# EAGLE board mm16 (EAGLE 6.1)
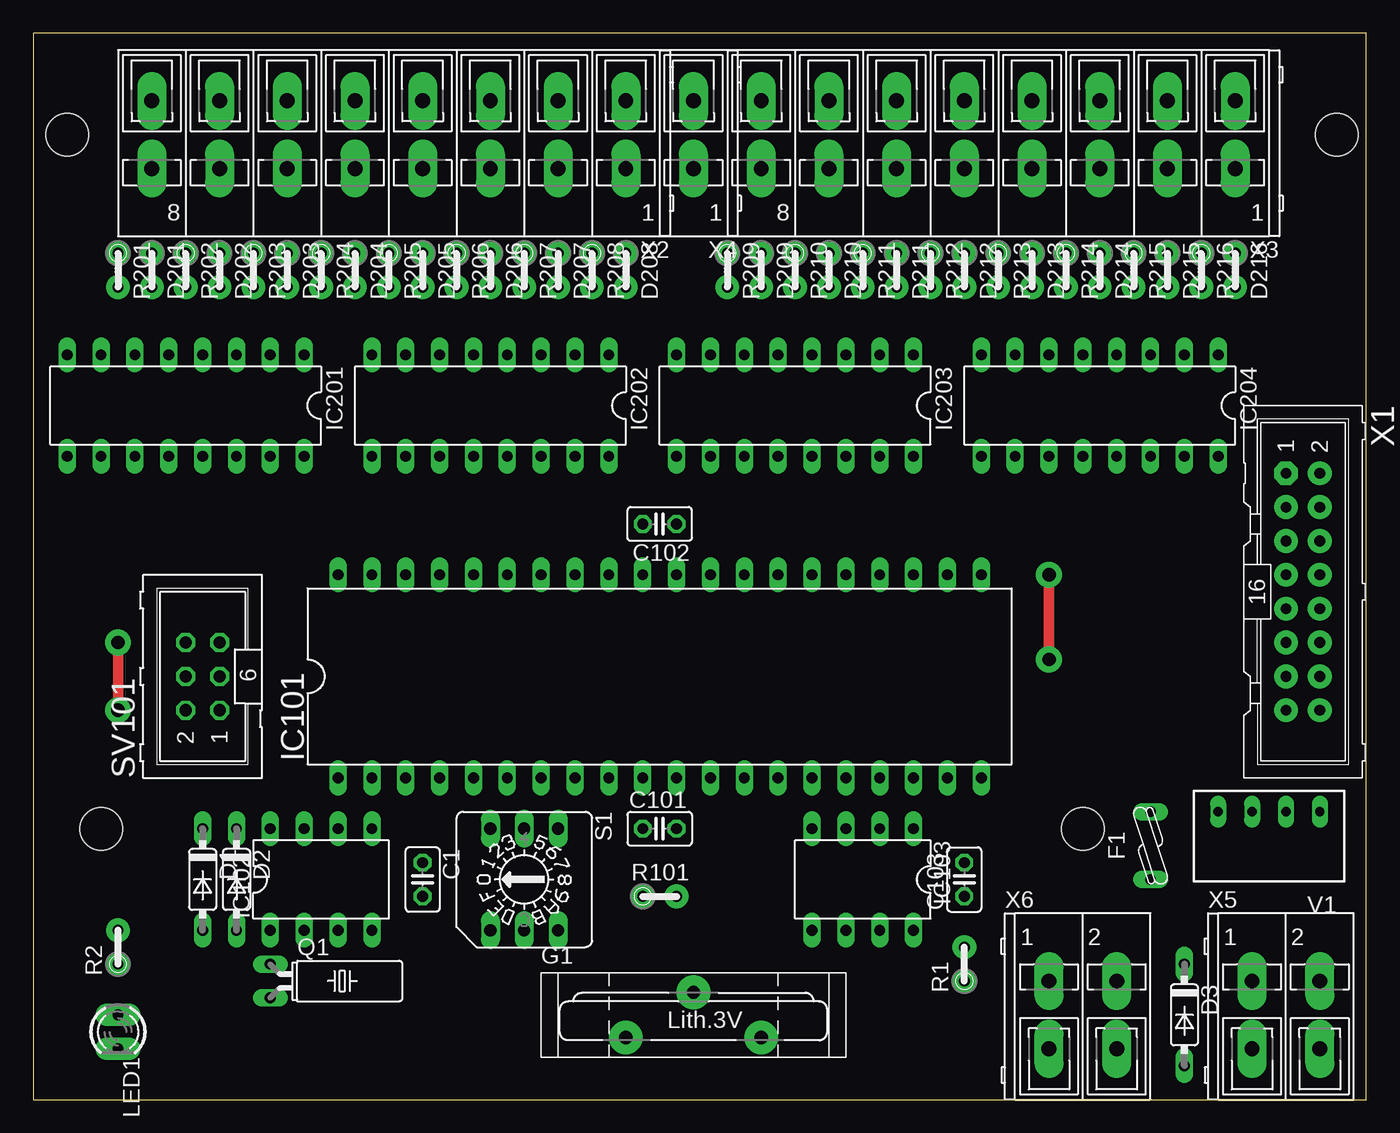
[diagram p0: board, top side]
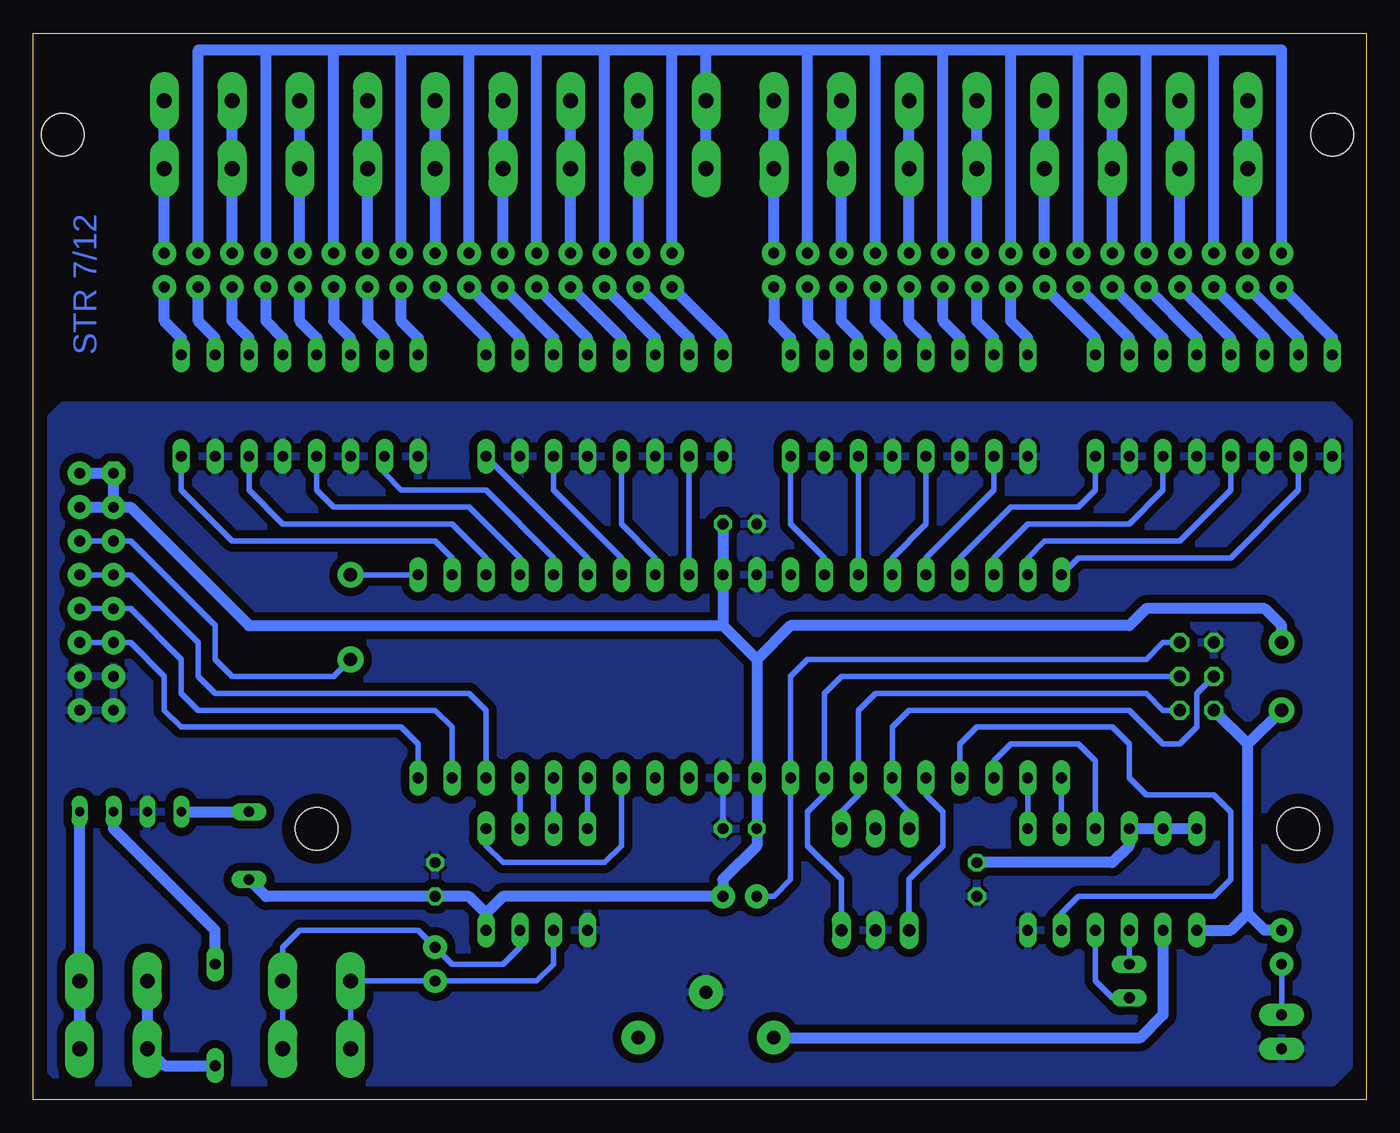
[diagram p1: board, bottom side, seen from below]

Size 100 x 80 mm. Coordinates in mm from the lower left corner, seen from the top.
Outline: 0,0 100,0 100,80 0,80 0,0
Copper layers (1*16): Top 0.035mm / dielectric 1.5mm / Bottom 0.035mm
Design rules: minimum track width 16mil, minimum drill 0.6mm, track to track 16mil, track to pad 16mil, pad to pad 16mil, via to via 16mil, smd to smd 16mil, copper to edge 1mm, drill to drill 1mm, minimum pad ring 10mil, minimum via ring 8mil, stop-mask expansion 4mil, vias tented up to drill 0mil, thermal gap 10mil
Holes 3.2 mm at 2.54,72.39 97.79,72.39 5.08,20.32 78.74,20.32

## Footprints (pad centres in the part's own frame; a part is rotated, then mirrored left to right if it is on the bottom)
C025-025X050 = drill 0.813 octagon: 1 -1.27,0; 2 1.27,0
DO35-7@1 = drill 0.813 long: A 3.81,0; C -3.81,0
DO35-7 = drill 0.813 long: A 3.81,0; C -3.81,0
DO35-V = drill 0.813 pad 1.778: 1 -1.27,0; 2 1.27,0
LP60-020 = drill 0.8 long: P$1 -2.54,0; P$2 2.54,0
KZH20PCB-V = drill 1 pad 2.54: +1 5.08,1.7; +2 -5.08,1.7; - 0,-1.7
DIL40 = drill 0.813 long: 1 -24.13,-7.62; 2 -21.59,-7.62; 3 -19.05,-7.62; 4 -16.51,-7.62; 5 -13.97,-7.62; 6 -11.43,-7.62; 7 -8.89,-7.62; 8 -6.35,-7.62; 9 -3.81,-7.62; 10 -1.27,-7.62; 11 1.27,-7.62; 12 3.81,-7.62; 13 6.35,-7.62; 14 8.89,-7.62; 15 11.43,-7.62; 16 13.97,-7.62; 17 16.51,-7.62; 18 19.05,-7.62; 19 21.59,-7.62; 20 24.13,-7.62; 21 24.13,7.62; 22 21.59,7.62; 23 19.05,7.62; 24 16.51,7.62; 25 13.97,7.62; 26 11.43,7.62; 27 8.89,7.62; 28 6.35,7.62; 29 3.81,7.62; 30 1.27,7.62; 31 -1.27,7.62; 32 -3.81,7.62; 33 -6.35,7.62; 34 -8.89,7.62; 35 -11.43,7.62; 36 -13.97,7.62; 37 -16.51,7.62; 38 -19.05,7.62; 39 -21.59,7.62; 40 -24.13,7.62
DIL08 = drill 0.813 long: 1 -3.81,-3.81; 2 -1.27,-3.81; 3 1.27,-3.81; 4 3.81,-3.81; 5 3.81,3.81; 6 1.27,3.81; 7 -1.27,3.81; 8 -3.81,3.81
DIL16 = drill 0.813 long: 1 -8.89,-3.81; 2 -6.35,-3.81; 3 -3.81,-3.81; 4 -1.27,-3.81; 5 1.27,-3.81; 6 3.81,-3.81; 7 6.35,-3.81; 8 8.89,-3.81; 9 8.89,3.81; 10 6.35,3.81; 11 3.81,3.81; 12 1.27,3.81; 13 -1.27,3.81; 14 -3.81,3.81; 15 -6.35,3.81; 16 -8.89,3.81
LED3MM = drill 0.813 pad 1.676 long: A -1.27,0; K 1.27,0
TC38H = drill 0.813 long: 1 -1.27,0; 2 1.27,0
0204V = drill 0.813 pad 1.778: 1 -1.27,0; 2 1.27,0
P103 = drill 0.914 long: 1 3.81,-2.54; 2 -3.81,2.54; 4 3.81,2.54; 8 -3.81,-2.54; C 3.81,0; C1 -3.81,0
ML6 = drill 0.914 octagon: GND 2.54,1.27; MISO -2.54,-1.27; MOSI 0,1.27; RESET 2.54,-1.27; SCK 0,-1.27; VCC -2.54,1.27
TME-24V = drill 0.7 pad 1.1 long: 1 -3.81,0; 2 -1.27,0; 3 1.27,0; 4 3.81,0
WS16V = drill 0.8 pad 1.778 octagon: 1 -8.89,-1.27 | drill 0.8 pad 1.778: 2 -8.89,1.27; 3 -6.35,-1.27; 4 -6.35,1.27; 5 -3.81,-1.27; 6 -3.81,1.27; 7 -1.27,-1.27; 8 -1.27,1.27; 9 1.27,-1.27; 10 1.27,1.27; 11 3.81,-1.27; 12 3.81,1.27; 13 6.35,-1.27; 14 6.35,1.27; 15 8.89,-1.27; 16 8.89,1.27
WAGO_236-408 = drill 1.118 pad 2.184 long: A1 -17.78,-3.81; A2 -12.7,-3.81; A3 -7.62,-3.81; A4 -2.54,-3.81; A5 2.54,-3.81; A6 7.62,-3.81; A7 12.7,-3.81; A8 17.78,-3.81; B1 -17.78,1.27; B2 -12.7,1.27; B3 -7.62,1.27; B4 -2.54,1.27; B5 2.54,1.27; B6 7.62,1.27; B7 12.7,1.27; B8 17.78,1.27
WAGO_236-401 = drill 1.118 pad 2.184 long: A1 0,-3.81; B1 0,1.27
WAGO_236-402 = drill 1.118 pad 2.184 long: A1 -2.54,-3.81; A2 2.54,-3.81; B1 -2.54,1.27; B2 2.54,1.27

## Placement (x,y rotation side)
C1  100nF  [C025-025X050]  29.21,16.51 270 top
C101  100nF  [C025-025X050]  46.99,20.32 0 top
C102  100nF  [C025-025X050]  46.99,43.18 180 top
C103  100nF  [C025-025X050]  69.85,16.51 90 top
D1  1N4148-7  [DO35-7@1]  12.7,16.51 270 top
D2  1N4148-7  [DO35-7@1]  15.24,16.51 270 top
D3  [DO35-7]  86.36,6.35 270 top
D201  1N4148-V  [DO35-V]  8.89,62.23 270 top
D202  1N4148-V  [DO35-V]  13.97,62.23 270 top
D203  1N4148-V  [DO35-V]  19.05,62.23 270 top
D204  1N4148-V  [DO35-V]  24.13,62.23 270 top
D205  1N4148-V  [DO35-V]  29.21,62.23 270 top
D206  1N4148-V  [DO35-V]  34.29,62.23 270 top
D207  1N4148-V  [DO35-V]  39.37,62.23 270 top
D208  1N4148-V  [DO35-V]  44.45,62.23 270 top
D209  1N4148-V  [DO35-V]  54.61,62.23 270 top
D210  1N4148-V  [DO35-V]  59.69,62.23 270 top
D211  1N4148-V  [DO35-V]  64.77,62.23 270 top
D212  1N4148-V  [DO35-V]  69.85,62.23 270 top
D213  1N4148-V  [DO35-V]  74.93,62.23 270 top
D214  1N4148-V  [DO35-V]  80.01,62.23 270 top
D215  1N4148-V  [DO35-V]  85.09,62.23 270 top
D216  1N4148-V  [DO35-V]  90.17,62.23 270 top
F1  LP60-020  [LP60-020]  83.82,19.05 90 top
G1  KZH20PCB-V  [KZH20PCB-V]  49.53,6.35 180 top
IC101  ATMEGA32-PU  [DIL40]  46.99,31.75 0 top
IC102  DS1337  [DIL08]  21.59,16.51 0 top
IC103  MAX483CPA  [DIL08]  62.23,16.51 180 top
IC201  LTV847  [DIL16]  11.43,52.07 180 top
IC202  LTV847  [DIL16]  34.29,52.07 180 top
IC203  LTV847  [DIL16]  57.15,52.07 180 top
IC204  LTV847  [DIL16]  80.01,52.07 180 top
LED1  [LED3MM]  6.35,5.08 270 top
Q1  32,768kHz  [TC38H]  17.78,8.89 270 top
R1  120Ω  [0204V]  69.85,10.16 90 top
R2  390Ω  [0204V]  6.35,11.43 90 top
R101  10k  [0204V]  46.99,15.24 0 top
R201  220kΩ  [0204V]  6.35,62.23 270 top
R202  220kΩ  [0204V]  11.43,62.23 270 top
R203  220kΩ  [0204V]  16.51,62.23 270 top
R204  220kΩ  [0204V]  21.59,62.23 270 top
R205  220kΩ  [0204V]  26.67,62.23 270 top
R206  220kΩ  [0204V]  31.75,62.23 270 top
R207  220kΩ  [0204V]  36.83,62.23 270 top
R208  220kΩ  [0204V]  41.91,62.23 270 top
R209  220kΩ  [0204V]  52.07,62.23 270 top
R210  220kΩ  [0204V]  57.15,62.23 270 top
R211  220kΩ  [0204V]  62.23,62.23 270 top
R212  220kΩ  [0204V]  67.31,62.23 270 top
R213  220kΩ  [0204V]  72.39,62.23 270 top
R214  220kΩ  [0204V]  77.47,62.23 270 top
R215  220kΩ  [0204V]  82.55,62.23 270 top
R216  220kΩ  [0204V]  87.63,62.23 270 top
S1  [P103]  36.83,16.51 270 top
SV101  [ML6]  12.7,31.75 90 top
V1  TME2405S  [TME-24V]  92.71,21.59 180 top
X1  [WS16V]  95.25,38.1 270 top
X2  [WAGO_236-408]  26.67,71.12 180 top
X3  [WAGO_236-408]  72.39,71.12 180 top
X4  [WAGO_236-401]  49.53,71.12 180 top
X5  [WAGO_236-402]  93.98,7.62 0 top
X6  [WAGO_236-402]  78.74,7.62 0 top

## Library data of the parts
C1 C101-C103 Q1 R1 R2 R101 R201-R216 = passiv
D1-D3 D201-D216 = diode
F1 = sicherung
G1 = batterie
IC101 = ic-mcu
IC102 = ic-controller
IC103 = ic-wandler
IC201-IC204 = ic-optokoppler
LED1 = led
S1 = switch-dil; OC_FARNELL: unknown; OC_NEWARK: unknown
SV101 = stecker
V1 = schaltregler; MPN: TME 2405S; OC_FARNELL: 1007547; OC_NEWARK: 51R5329
X1-X6 = anschluss

## Nets
!R: IC101.21 X1.5 X1.6
+5V: C101.1 C102.1 C103.1 D1.A F1.P$1 IC101.10 IC101.30 IC103.8 R2.2 R101.2 SV101.VCC X1.1 X1.2 X1.3 X1.4
ALARM1: IC101.4 IC102.3
ALARM2: IC101.3 IC102.7
C1: IC101.18 X1.7 X1.8
C2: IC101.19 X1.9 X1.10
D: IC101.20 X1.11 X1.12
GND: C1.2 C101.2 C102.2 C103.2 G1.- IC101.11 IC101.31 IC102.4 IC103.5 IC201.9 IC201.11 IC201.13 IC201.15 IC202.9 IC202.11 IC202.13 IC202.15 IC203.9 IC203.11 IC203.13 IC203.15 IC204.9 IC204.11 IC204.13 IC204.15 LED1.K S1.C SV101.GND V1.3 X1.13 X1.14 X1.15 X1.16
GNDIO: R201.1 R202.1 R203.1 R204.1 R205.1 R206.1 R207.1 R208.1 R209.1 R210.1 R211.1 R212.1 R213.1 R214.1 R215.1 R216.1 X4.A1 X4.B1
IN0: IC101.40 IC201.10
IN1: IC101.39 IC201.12
IN2: IC101.38 IC201.14
IN3: IC101.37 IC201.16
IN4: IC101.36 IC202.10
IN5: IC101.35 IC202.12
IN6: IC101.34 IC202.14
IN7: IC101.33 IC202.16
IN8: IC101.29 IC203.10
IN9: IC101.28 IC203.12
IN10: IC101.27 IC203.14
IN11: IC101.26 IC203.16
IN12: IC101.25 IC204.10
IN13: IC101.24 IC204.12
IN14: IC101.23 IC204.14
IN15: IC101.22 IC204.16
N$1: D201.2 IC201.7
N$2: IC201.8 R201.2
N$3: D202.2 IC201.5
N$4: IC201.6 R202.2
N$5: D203.2 IC201.3
N$6: IC201.4 R203.2
N$7: D204.2 IC201.1
N$8: IC201.2 R204.2
N$9: D205.2 IC202.7
N$10: IC202.8 R205.2
N$11: D206.2 IC202.5
N$12: IC202.6 R206.2
N$13: D207.2 IC202.3
N$14: IC202.4 R207.2
N$15: D208.2 IC202.1
N$16: IC202.2 R208.2
N$19: V1.1 X5.A2 X5.B2
N$20: IC103.6 R1.1 X6.A1 X6.B1
N$21: D2.A G1.+1 G1.+2
N$22: IC103.7 R1.2 X6.A2 X6.B2
N$23: D3.C V1.2
N$24: D3.A X5.A1 X5.B1
N$25: D209.2 IC203.7
N$26: IC203.8 R209.2
N$27: D210.2 IC203.5
N$28: IC203.6 R210.2
N$29: D211.2 IC203.3
N$30: IC203.4 R211.2
N$31: D212.2 IC203.1
N$32: IC203.2 R212.2
N$33: D213.2 IC204.7
N$34: IC204.8 R213.2
N$35: D214.2 IC204.5
N$36: IC204.6 R214.2
N$37: D215.2 IC204.3
N$38: IC204.4 R215.2
N$39: D216.2 IC204.1
N$40: IC204.2 R216.2
N$41: F1.P$2 V1.4
N$42: IC101.9 R101.1 SV101.RESET
N$44: LED1.A R2.1
N$50: D204.1 X2.A5 X2.B5
N$52: D203.1 X2.A6 X2.B6
N$55: D202.1 X2.A7 X2.B7
N$57: D201.1 X2.A8 X2.B8
N$61: IC101.15 IC103.4
N$62: IC101.14 IC103.1
N$63: IC101.17 IC103.2
N$64: IC101.16 IC103.3
N$65: D205.1 X2.A4 X2.B4
N$67: D206.1 X2.A3 X2.B3
N$69: D207.1 X2.A2 X2.B2
N$71: D208.1 X2.A1 X2.B1
N$73: D216.1 X3.A1 X3.B1
N$77: D215.1 X3.A2 X3.B2
N$79: D214.1 X3.A3 X3.B3
N$81: D213.1 X3.A4 X3.B4
N$83: D212.1 X3.A5 X3.B5
N$85: D211.1 X3.A6 X3.B6
N$86: D209.1 X3.A8 X3.B8
N$88: D210.1 X3.A7 X3.B7
N$122: IC101.6 S1.8 SV101.MOSI
N$123: IC101.7 S1.2 SV101.MISO
N$125: IC101.8 S1.4 SV101.SCK
N$126: IC102.1 Q1.1
N$127: IC102.2 Q1.2
N$130: IC101.5 S1.1
SCL: IC101.1 IC102.6
SDA: IC101.2 IC102.5
VCC: C1.1 D1.C D2.C IC102.8

## Tracks (layer width: path | path; a pad name or v marks a point on that pad's centre or on a via)
!R  (via drill 1 pad 1.93)
  Top 0.8: v76.2,33.02 v76.2,39.37
  Bottom 0.406: X1.6 X1.5 92.71,41.91 86.36,35.56 86.36,33.02 85.09,31.75 77.47,31.75 v76.2,33.02 | v76.2,39.37 IC101.21
+5V  (via drill 1 pad 1.93)
  Top 0.8: v6.35,29.21 v6.35,34.29
  Bottom 0.813: 66.04,13.97 64.77,15.24 R101.2 48.26,16.51 45.72,19.05 C101.1 IC101.10 45.72,33.02 | 66.04,13.97 IC103.8 | C102.1 IC101.30 48.26,35.56 | 48.26,35.56 45.72,33.02 | 66.04,13.97 67.31,15.24 C103.1 82.55,15.24 F1.P$1 | X1.4 X1.3 | X1.2 X1.1 X1.3 | X1.3 92.71,44.45 83.82,35.56 48.26,35.56 | v6.35,34.29 6.35,35.56 7.62,36.83 16.51,36.83 17.78,35.56 43.18,35.56 45.72,33.02 | D1.A 10.16,12.7 8.89,13.97 | 8.89,13.97 8.89,26.67 | SV101.VCC 8.89,26.67 | 8.89,26.67 v6.35,29.21 | R2.2 7.62,12.7 8.89,13.97
ALARM1
  Bottom 0.406: IC102.3 22.86,13.97 21.59,15.24 11.43,15.24 10.16,16.51 10.16,21.59 11.43,22.86 16.51,22.86 17.78,24.13 17.78,26.67 19.05,27.94 29.21,27.94 30.48,26.67 IC101.4
ALARM2
  Bottom 0.406: IC101.3 27.94,25.4 26.67,26.67 21.59,26.67 20.32,25.4 IC102.7
C1
  Bottom 0.406: X1.8 X1.7 92.71,39.37 87.63,34.29 87.63,31.75 86.36,30.48 67.31,30.48 66.04,29.21 IC101.18
C2
  Bottom 0.406: X1.10 X1.9 92.71,36.83 88.9,33.02 88.9,30.48 87.63,29.21 69.85,29.21 68.58,27.94 IC101.19
D
  Bottom 0.406: X1.12 X1.11 92.71,34.29 90.17,31.75 90.17,29.21 88.9,27.94 72.39,27.94 71.12,26.67 IC101.20
GND
  Bottom 0.406: IC101.11 C101.2
  pour Bottom (isolate 0.61): 2.54,52.07 97.79,52.07 99.06,50.8 99.06,2.54 97.79,1.27 2.54,1.27 1.27,2.54 1.27,50.8
GNDIO
  Bottom 0.813: R216.1 87.63,78.74 82.55,78.74 | R215.1 82.55,78.74 | R214.1 77.47,78.74 | R213.1 72.39,78.74 | R212.1 67.31,78.74 | R211.1 62.23,78.74 | R210.1 57.15,78.74 | R209.1 52.07,78.74 | R208.1 41.91,78.74 | R207.1 36.83,78.74 | R206.1 31.75,78.74 | R205.1 26.67,78.74 | R204.1 21.59,78.74 | R203.1 16.51,78.74 | R202.1 11.43,78.74 | R201.1 6.35,78.74 11.43,78.74 | 11.43,78.74 16.51,78.74 | 16.51,78.74 21.59,78.74 | 21.59,78.74 26.67,78.74 | 26.67,78.74 31.75,78.74 | 31.75,78.74 36.83,78.74 | 36.83,78.74 41.91,78.74 | 41.91,78.74 49.53,78.74 | 49.53,78.74 52.07,78.74 | 52.07,78.74 57.15,78.74 | 57.15,78.74 62.23,78.74 | 62.23,78.74 67.31,78.74 | 67.31,78.74 72.39,78.74 | 72.39,78.74 77.47,78.74 | 77.47,78.74 82.55,78.74 | X4.B1 X4.A1 49.53,78.74
IN0
  Bottom 0.406: IC201.10 5.08,45.72 10.16,40.64 21.59,40.64 IC101.40
IN1
  Bottom 0.406: IC201.12 10.16,45.72 13.97,41.91 24.13,41.91 25.4,40.64 IC101.39
IN2
  Bottom 0.406: IC201.14 15.24,45.72 17.78,43.18 25.4,43.18 27.94,40.64 IC101.38
IN3
  Bottom 0.406: IC201.16 20.32,45.72 21.59,44.45 26.67,44.45 30.48,40.64 IC101.37
IN4
  Bottom 0.406: IC202.10 27.94,45.72 33.02,40.64 IC101.36
IN5
  Bottom 0.406: IC202.12 33.02,43.18 35.56,40.64 IC101.35
IN6
  Bottom 0.406: IC202.14 IC101.34
IN7
  Bottom 0.406: IC202.16 43.18,43.18 40.64,40.64 IC101.33
IN8
  Bottom 0.406: IC203.10 IC101.29
IN9
  Bottom 0.406: IC203.12 55.88,43.18 53.34,40.64 IC101.28
IN10
  Bottom 0.406: IC203.14 60.96,45.72 55.88,40.64 IC101.27
IN11
  Bottom 0.406: IC203.16 58.42,40.64 IC101.26
IN12
  Bottom 0.406: IC204.10 73.66,46.99 72.39,45.72 66.04,45.72 60.96,40.64 IC101.25
IN13
  Bottom 0.406: IC101.24 63.5,40.64 67.31,44.45 77.47,44.45 78.74,45.72 IC204.12
IN14
  Bottom 0.406: IC101.23 66.04,40.64 68.58,43.18 81.28,43.18 83.82,45.72 IC204.14
IN15
  Bottom 0.406: IC101.22 68.58,40.64 69.85,41.91 85.09,41.91 88.9,45.72 IC204.16
N$1
  Bottom 0.813: D201.2 5.08,57.15 IC201.7
N$2
  Bottom 0.813: R201.2 2.54,57.15 IC201.8
N$3
  Bottom 0.813: D202.2 10.16,57.15 IC201.5
N$4
  Bottom 0.813: R202.2 7.62,57.15 IC201.6
N$5
  Bottom 0.813: D203.2 15.24,57.15 IC201.3
N$6
  Bottom 0.813: R203.2 12.7,57.15 IC201.4
N$7
  Bottom 0.813: D204.2 20.32,57.15 IC201.1
N$8
  Bottom 0.813: R204.2 17.78,57.15 IC201.2
N$9
  Bottom 0.813: IC202.7 27.94,57.15 29.21,58.42 D205.2
N$10
  Bottom 0.813: IC202.8 25.4,57.15 26.67,58.42 R205.2
N$11
  Bottom 0.813: IC202.5 33.02,57.15 34.29,58.42 D206.2
N$12
  Bottom 0.813: IC202.6 30.48,57.15 31.75,58.42 R206.2
N$13
  Bottom 0.813: IC202.3 38.1,57.15 39.37,58.42 D207.2
N$14
  Bottom 0.813: IC202.4 35.56,57.15 36.83,58.42 R207.2
N$15
  Bottom 0.813: D208.2 44.45,58.42 43.18,57.15 IC202.1
N$16
  Bottom 0.813: R208.2 41.91,58.42 40.64,57.15 IC202.2
N$19
  Bottom 0.813: X5.B2 X5.A2 V1.1
N$20
  Bottom 0.406: X6.A1 X6.B1 R1.1 62.23,8.89 60.96,10.16 IC103.6
N$21
  Bottom 0.813: D2.A 15.24,6.35 16.94,4.65 G1.+1
N$22
  Bottom 0.406: IC103.7 63.5,11.43 64.77,10.16 68.58,10.16 R1.2 71.12,12.7 80.01,12.7 81.28,11.43 X6.B2 X6.A2
N$23
  Bottom 0.813: D3.C 86.36,12.7 93.98,20.32 V1.2
N$24
  Bottom 0.813: X5.B1 X5.A1 90.17,2.54 D3.A
N$25
  Bottom 0.813: D209.2 50.8,57.15 IC203.7
N$26
  Bottom 0.813: R209.2 48.26,57.15 IC203.8
N$27
  Bottom 0.813: D210.2 55.88,57.15 IC203.5
N$28
  Bottom 0.813: R210.2 53.34,57.15 IC203.6
N$29
  Bottom 0.813: D211.2 60.96,57.15 IC203.3
N$30
  Bottom 0.813: R211.2 58.42,57.15 IC203.4
N$31
  Bottom 0.813: D212.2 66.04,57.15 IC203.1
N$32
  Bottom 0.813: R212.2 63.5,57.15 IC203.2
N$33
  Bottom 0.813: D213.2 74.93,58.42 73.66,57.15 IC204.7
N$34
  Bottom 0.813: IC204.8 71.12,57.15 72.39,58.42 R213.2
N$35
  Bottom 0.813: IC204.5 78.74,57.15 80.01,58.42 D214.2
N$36
  Bottom 0.813: R214.2 77.47,58.42 76.2,57.15 IC204.6
N$37
  Bottom 0.813: IC204.3 83.82,57.15 85.09,58.42 D215.2
N$38
  Bottom 0.813: IC204.4 81.28,57.15 82.55,58.42 R215.2
N$39
  Bottom 0.813: IC204.1 88.9,57.15 90.17,58.42 D216.2
N$40
  Bottom 0.813: IC204.2 86.36,57.15 87.63,58.42 R216.2
N$41
  Bottom 0.813: V1.4 F1.P$2
N$42
  Bottom 0.406: SV101.RESET 15.24,34.29 16.51,33.02 41.91,33.02 43.18,31.75 IC101.9 43.18,16.51 44.45,15.24 R101.1
N$44
  Bottom 0.406: LED1.A R2.1
N$50
  Bottom 0.813: D204.1 X2.A5
N$52
  Bottom 0.813: D203.1 X2.A6
N$55
  Bottom 0.813: D202.1 X2.A7
N$57
  Bottom 0.813: D201.1 X2.A8
N$61
  Bottom 0.406: IC101.15 IC103.4
N$62
  Bottom 0.406: IC103.1 66.04,19.05 64.77,17.78 57.15,17.78 55.88,19.05 IC101.14
N$63
  Bottom 0.406: IC101.17 IC103.2
N$64
  Bottom 0.406: IC101.16 IC103.3
N$65
  Bottom 0.813: D205.1 X2.A4
N$67
  Bottom 0.813: D206.1 X2.A3
N$69
  Bottom 0.813: D207.1 X2.A2
N$71
  Bottom 0.813: D208.1 X2.A1
N$73
  Bottom 0.813: D216.1 X3.A1
N$77
  Bottom 0.813: D215.1 X3.A2
N$79
  Bottom 0.813: D214.1 X3.A3
N$81
  Bottom 0.813: D213.1 X3.A4
N$83
  Bottom 0.813: X3.B5 X3.A5 D212.1
N$85
  Bottom 0.813: D211.1 X3.A6
N$86
  Bottom 0.813: D209.1 X3.A8
N$88
  Bottom 0.813: D210.1 X3.A7
N$122
  Bottom 0.406: SV101.MOSI 12.7,30.48 12.7,27.94 13.97,26.67 15.24,26.67 17.78,29.21 34.29,29.21 35.56,27.94 IC101.6 35.56,22.86 34.29,21.59 S1.8
N$123
  Bottom 0.406: SV101.MISO 15.24,29.21 16.51,30.48 36.83,30.48 38.1,29.21 IC101.7 38.1,22.86 39.37,21.59 S1.2
N$125
  Bottom 0.406: SV101.SCK 39.37,31.75 40.64,30.48 IC101.8 40.64,22.86 41.91,21.59 41.91,19.05 39.37,16.51 S1.4
N$126
  Bottom 0.406: IC102.1 Q1.1
N$127
  Bottom 0.406: IC102.2 20.32,8.89 19.05,7.62 Q1.2
N$130
  Bottom 0.406: IC101.5 33.02,22.86 31.75,21.59 31.75,19.05 34.29,16.51 S1.1
SCL
  Bottom 0.406: IC102.6 IC101.1
SDA
  Bottom 0.406: IC102.5 IC101.2
VCC
  Bottom 0.813: C1.1 19.05,17.78 17.78,19.05 IC102.8 D1.C D2.C

## Text on the board
Bottom: STR 7/12